# EAGLE board main_low_pass (EAGLE 6.4)
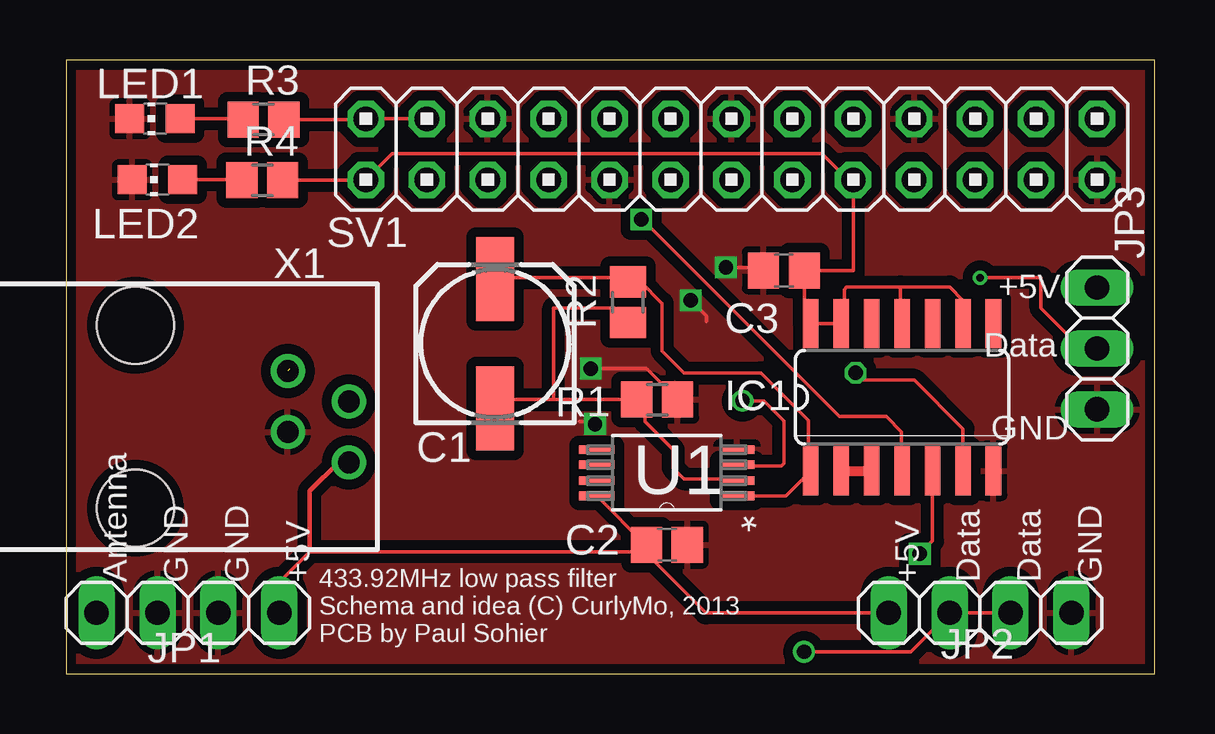
[diagram p0: board, top side]
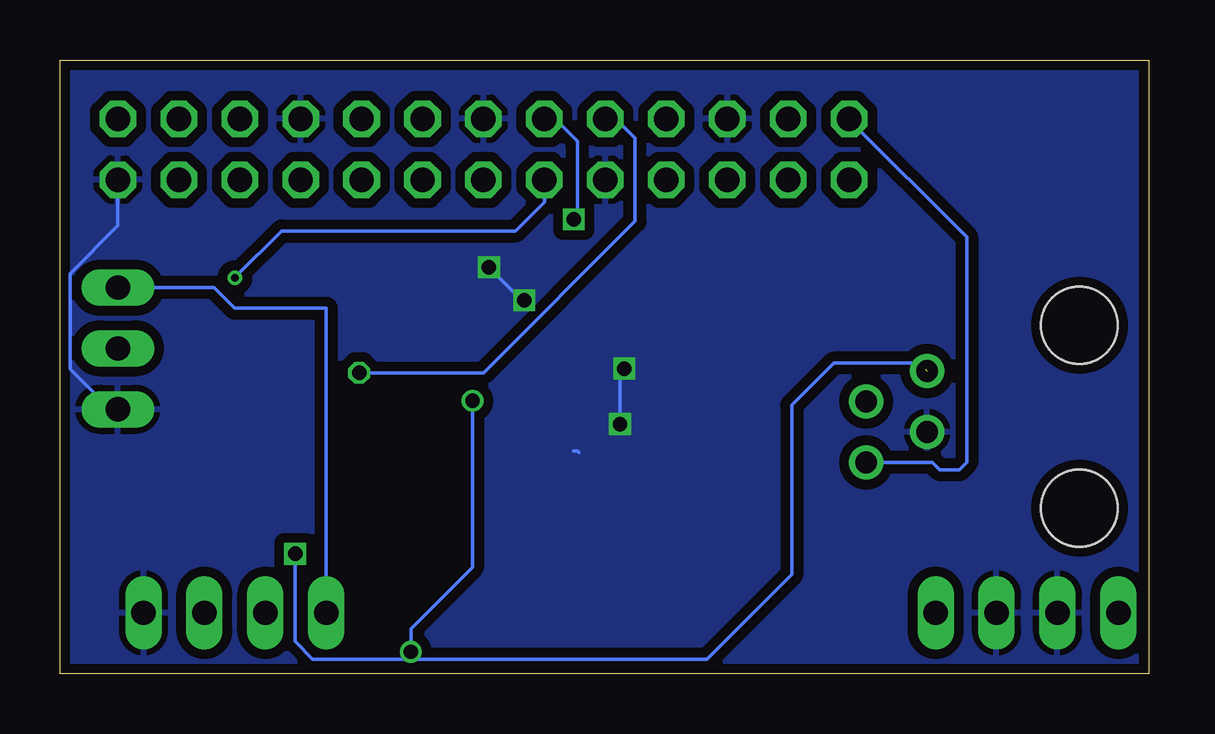
[diagram p1: board, bottom side, seen from below]

Size 45.39 x 25.59 mm. Coordinates in mm from the lower left corner, seen from the top.
Outline: 0,0 45.39,0 45.39,25.59 0,25.59 0,0
Copper layers (1*16): Top 0.035mm / dielectric 1.5mm / Bottom 0.035mm
Design rules "ITEADstudio_DRC": minimum track width 6mil, minimum drill 12mil, track to track 6mil, track to pad 6mil, pad to pad 6mil, via to via 6mil, smd to smd 0mil, copper to edge 10mil, drill to drill 10mil, minimum pad ring 10mil, minimum via ring 6mil, stop-mask expansion 2mil, vias tented up to drill 100mil, thermal gap 10mil

## Footprints (pad centres in the part's own frame; a part is rotated, then mirrored left to right if it is on the bottom)
153CLV-0605 = smd 3.5 x 1.6: + 2.7,0; - -2.7,0
C0805 = smd 1.3 x 1.5: 1 -0.85,0; 2 0.85,0
SO14 = smd 0.66 x 2.032: 1 -3.81,-3.073; 2 -2.54,-3.073; 3 -1.27,-3.073; 4 0,-3.073; 5 1.27,-3.073; 6 2.54,-3.073; 7 3.81,-3.073; 8 3.81,3.073; 9 2.54,3.073; 10 1.27,3.073; 11 0,3.073; 12 -1.27,3.073; 13 -2.54,3.073; 14 -3.81,3.073
1X04 = drill 1.016 long: 1 -3.81,0; 2 -1.27,0; 3 1.27,0; 4 3.81,0
1X03 = drill 1.016 long: 1 -2.54,0; 2 0,0; 3 2.54,0
CHIP-LED0805 = smd 1.2 x 1.2: A 0,-1.05; C 0,1.05
R0805 = smd 1.3 x 1.5: 1 -0.85,0; 2 0.85,0
2X13 = drill 1.016 octagon: 1 -15.24,-1.27; 2 -15.24,1.27; 3 -12.7,-1.27; 4 -12.7,1.27; 5 -10.16,-1.27; 6 -10.16,1.27; 7 -7.62,-1.27; 8 -7.62,1.27; 9 -5.08,-1.27; 10 -5.08,1.27; 11 -2.54,-1.27; 12 -2.54,1.27; 13 0,-1.27; 14 0,1.27; 15 2.54,-1.27; 16 2.54,1.27; 17 5.08,-1.27; 18 5.08,1.27; 19 7.62,-1.27; 20 7.62,1.27; 21 10.16,-1.27; 22 10.16,1.27; 23 12.7,-1.27; 24 12.7,1.27; 25 15.24,-1.27; 26 15.24,1.27
SOP65P640X120-8N = smd 1.473 x 0.356: 1 -2.921,0.965; 2 -2.921,0.33; 3 -2.921,-0.33; 4 -2.921,-0.965; 5 2.921,-0.965; 6 2.921,-0.33; 7 2.921,0.33; 8 2.921,0.965
14867 = drill 0.9 pad 1.422: 1 -1.905,6.35; 2 -0.635,8.89; 3 0.635,6.35; 4 1.905,8.89 | hole 3.2: -3.81,0; 3.81,0

## Placement (x,y rotation side)
C1  15u  [153CLV-0605]  17.88,13.77 90 top
C2  [C0805]  25.04,5.38 0 top
C3  [C0805]  29.92,16.81 180 top
IC1  74HC14D  [SO14]  34.85,11.53 0 top
JP1  [1X04]  5.08,2.54 0 top
JP2  [1X04]  38.1,2.54 0 top
JP3  [1X03]  42.98,13.56 90 top
LED1  [CHIP-LED0805]  3.71,23.14 90 top
LED2  [CHIP-LED0805]  3.81,20.6 90 top
R1  [R0805]  24.64,11.43 180 top
R2  [R0805]  23.42,15.49 90 top
R3  [R0805]  8.23,23.11 0 top
R4  [R0805]  8.18,20.57 0 top
SV1  [2X13]  27.74,21.87 0 top
U1  [SOP65P640X120-8N]  25.04,8.38 180 top
X1  14867  [14867]  2.9,10.72 270 top

## Library data of the parts
C1-C3 R1-R4 = resistor
IC1 = 74xx-eu
JP1-JP3 SV1 = pinhead
LED1 LED2 = led
U1 = untitled; MPN: LM358PW; OC_FARNELL: 8389250; OC_NEWARK: 38K3721; PACKAGE: TSSOP-8; SUPPLIER: Texas Instruments
X1 = con-4ucon; OC_FARNELL: unknown; OC_NEWARK: unknown

## Nets
GND: C2.2 C3.2 IC1.7 JP1.2 JP1.3 JP2.4 JP3.1 LED1.C LED2.C R1.1 SV1.6 SV1.9 SV1.14 SV1.20 SV1.25 U1.4 X1.3
N$1: JP2.2 JP2.3 U1.3
N$2: C1.- R1.2 R2.1 U1.2
N$3: IC1.2 IC1.3
N$4: IC1.5 X1.1
N$5: JP3.2 SV1.11
N$6: C2.1 JP1.4 JP2.1 JP3.3 R3.2 SV1.2 SV1.4 U1.8 X1.4
N$7: C1.+ IC1.1 R2.2 U1.1
N$8: LED1.A R3.1
N$9: LED2.A R4.1
N$10: IC1.4 SV1.12
N$11: IC1.6 SV1.10
VCC: C3.1 IC1.9 IC1.11 IC1.13 IC1.14 R4.2 SV1.1 SV1.17

## Tracks (layer width: path | path; a pad name or v marks a point on that pad's centre or on a via)
GND  (via drill 0.6)
  Top 0.152: R1.1 24.19,12.72 v21.87,12.72 | v22.05,10.41 21.95,10.52 21.41,10.52 | C3.2 28.94,16.94 v27.51,16.94 | v26.04,15.57 26.7,14.91 26.7,14.68
  Bottom 0.152: JP3.1 43.28,11.02 44.96,12.7 44.96,16.7 42.98,18.68 SV1.25 | 23.75,9.22 23.82,9.3 23.98,9.3 | v21.87,12.72 22.05,12.55 v22.05,10.41 | v27.51,16.94 26.14,15.57 v26.04,15.57
  pour Bottom (isolate 0.406): -0.15,25.45 0,0 45.52,0 45.36,25.6
  pour Top (isolate 0.406): 0,0 -0.3,25.45 45.42,25.6 45.72,0
N$1  (via drill 0.6)
  Top 0.152: JP2.3 JP2.2 | 36.88,2.59 JP2.2 | JP2.2 35.2,0.91 v30.76,0.91 | U1.3 28.02,8.66 29.82,8.66 29.92,8.76 29.92,10.54 29.08,11.38 v28.19,11.38
  Bottom 0.152: v28.19,11.38 28.19,4.45 30.76,1.88 v30.76,0.91
N$2
  Top 0.152: 20.32,11.43 17.78,11.43 C1.- | 20.32,11.43 R1.2 24.13,11.43 24.13,10.52 25.3,9.35 25.3,8.59 25.76,8.13 27.89,8.13 U1.2 | 20.32,11.43 20.32,15.24 22.86,15.24 R2.1
N$3
  Top 0.406: IC1.2 IC1.3
N$4  (via drill 0.6)  (1 unrouted)
  Top 0.152: v35.59,5 36.12,5.54 IC1.5
  Bottom 0.152: 9.32,12.7 9.58,12.95 13.13,12.95 14.88,11.2 14.88,4.14 18.41,0.61 34.85,0.61 35.59,1.35 v35.59,5
N$5  (via drill 0.3)
  Top 0.152: v38.1,16.51 40.64,16.51 40.64,15.24 42.32,13.56 JP3.2
  Bottom 0.152: v38.1,16.51 36.14,18.47 26.39,18.47 25.2,19.66 SV1.11
N$6  (via drill 0.6)
  Top 0.152: JP1.4 8.89,3.81 10.16,5.08 24.13,5.08 | 24.13,5.08 26.67,2.54 JP2.1 | 24.13,5.08 C2.1 24.16,5.38 U1.8 | R3.2 v12.5,23.11 SV1.2 SV1.4
  Top 0.178: 10.16,5.08 10.16,7.62 11.35,8.81 X1.4
  Bottom 0.152: JP2.1 34.29,15.24 38.1,15.24 38.96,16.1 JP3.3 | v12.5,23.11 7.59,18.21 7.59,8.81 7.9,8.51 8.71,8.51 9.02,8.81 X1.4
N$7
  Top 0.152: C1.+ 17.78,16.51 22.86,16.51 R2.2 23.94,16.34 24.84,15.44 24.84,13.46 25.76,12.55 28.96,12.55 30.94,10.57 30.94,8.56 IC1.1 30,7.42 U1.1
N$8
  Top 0.152: LED1.A 7.38,23.14 R3.1
N$9
  Top 0.152: LED2.A 7.33,20.6 R4.1
N$10  (via drill 0.6)
  Top 0.152: IC1.4 34.82,8.48 34.82,10.08 34.19,10.72 32.23,10.72 24,18.95 v23.98,18.95
  Bottom 0.152: v23.98,18.95 23.82,19.1 23.82,22.2 24.77,23.14 SV1.12
N$11  (via drill 0.6)
  Top 0.152: IC1.6 37.39,10.21 35.36,12.24 33.22,12.24 v32.92,12.55
  Bottom 0.152: v32.92,12.55 27.74,12.55 21.41,18.87 21.41,22.33 22.23,23.14 SV1.10
VCC
  Top 0.152: R4.2 12.5,20.57 SV1.1 13.59,21.69 31.5,21.69 32.59,20.6 SV1.17 32.82,16.82 C3.1 30.77,14.61 IC1.14 IC1.13 32.44,14.73 32.44,16.03 32.54,16.13 34.77,16.13 | 34.77,16.13 36.83,16.13 37.39,15.57 IC1.9 | IC1.11 34.77,14.68 34.77,16.13

## Text on the board
tPlace: +5V | Data | GND | Antenna | GND | GND | +5V | +5V | Data | Data | GND | 433.92MHz low pass filter / Schema and idea (C) CurlyMo, 2013 / PCB by Paul Sohier